# EAGLE board schematic (EAGLE 9.6.2)
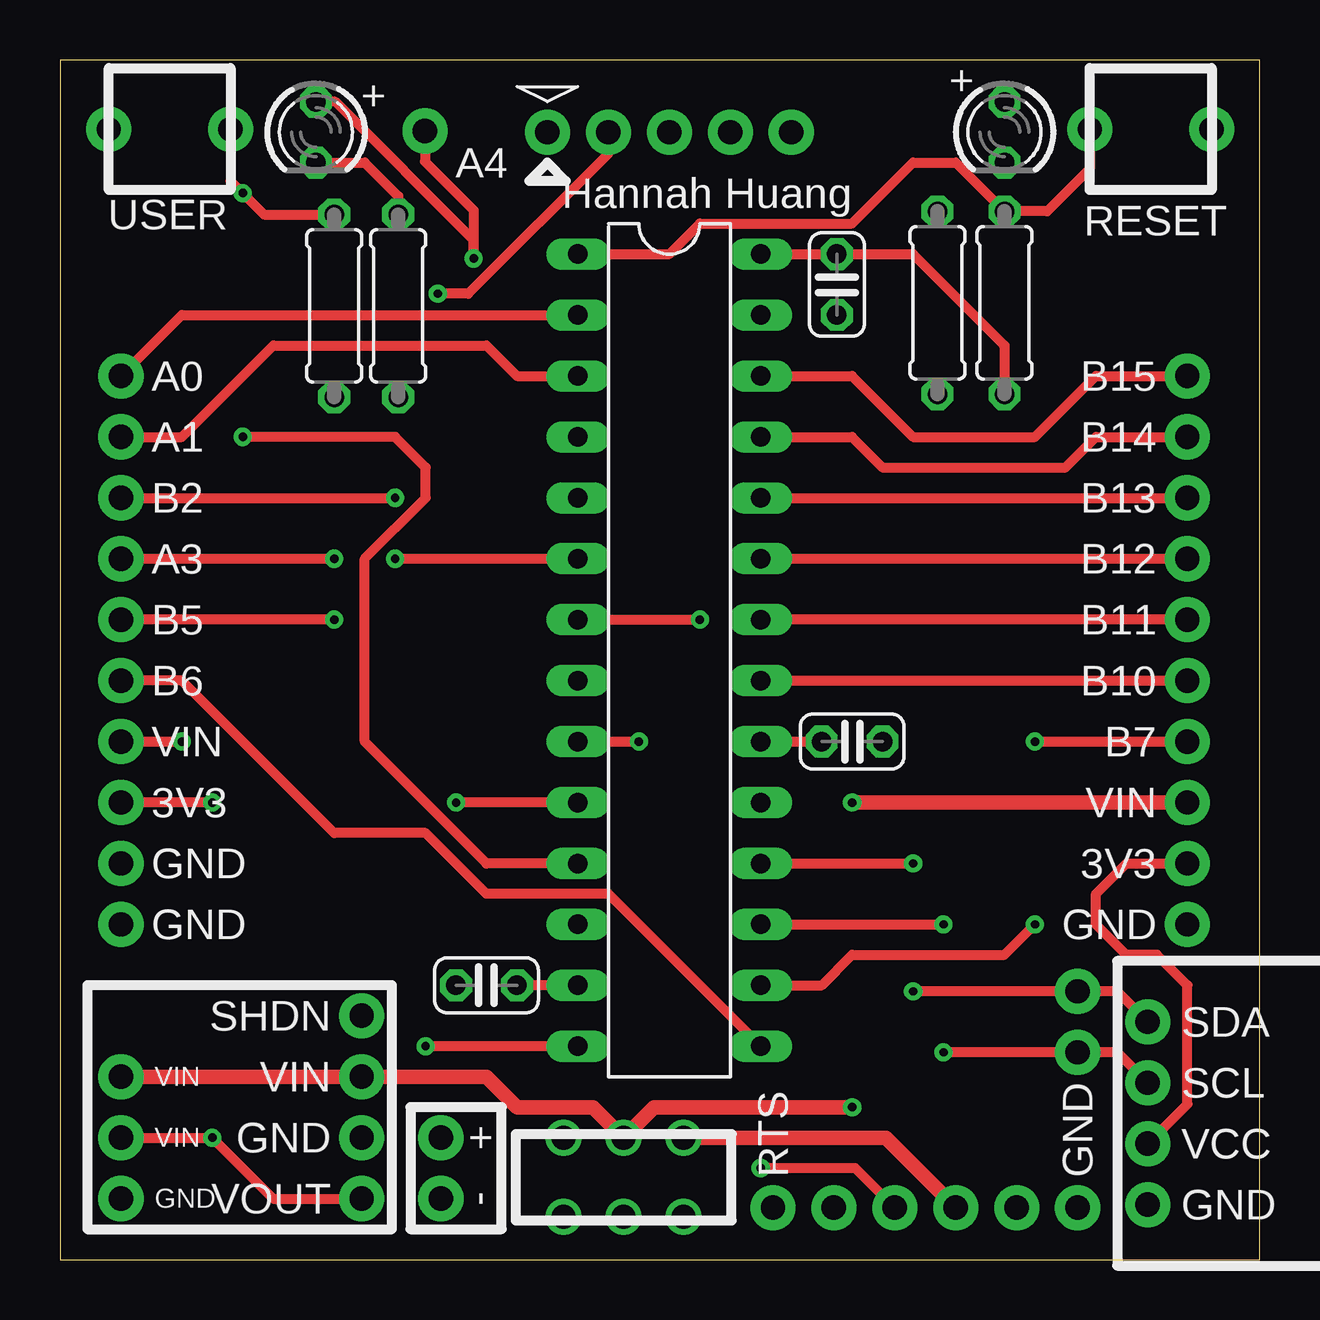
[diagram p0: board, top side]
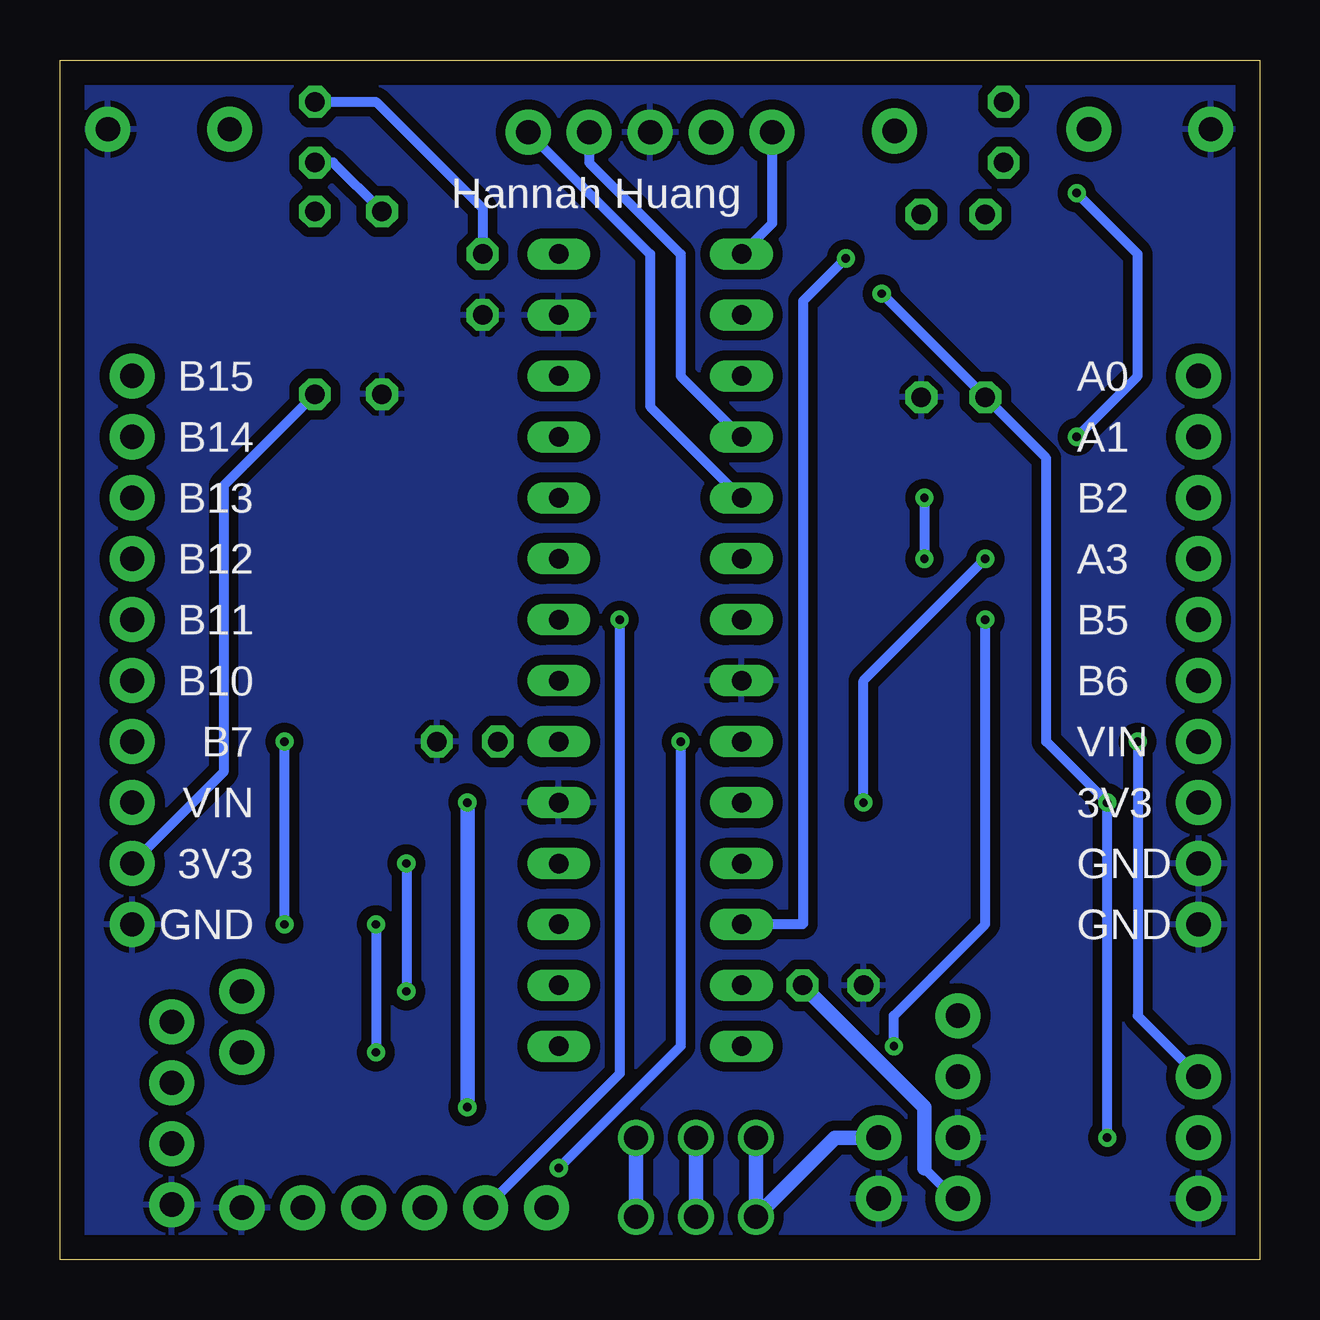
[diagram p1: board, bottom side, seen from below]

Size 50 x 50 mm. Coordinates in mm from the lower left corner, seen from the top.
Outline: 0,0 50,0 50,50 0,50 0,0
Copper layers (1*16): Top 0.035mm / dielectric 1.5mm / Bottom 0.035mm
Design rules "default": minimum track width 6mil, minimum drill 0.35mm, track to track 6mil, track to pad 6mil, pad to pad 6mil, via to via 6mil, smd to smd 6mil, copper to edge 40mil, drill to drill 6mil, minimum pad ring 10mil, minimum via ring 8mil, stop-mask expansion 4mil, vias tented up to drill 0mil, thermal gap 10mil

## Footprints (pad centres in the part's own frame; a part is rotated, then mirrored left to right if it is on the bottom)
C025-024X044 = drill 0.813 octagon: 1 -1.27,0; 2 1.27,0
LED3MM = drill 0.813 octagon: A -1.27,0; K 1.27,0
0207/7 = drill 0.813 octagon: 1 -3.81,0; 2 3.81,0
DIL28-3 = drill 0.813 long: 1 -16.51,-3.81; 2 -13.97,-3.81; 3 -11.43,-3.81; 4 -8.89,-3.81; 5 -6.35,-3.81; 6 -3.81,-3.81; 7 -1.27,-3.81; 8 1.27,-3.81; 9 3.81,-3.81; 10 6.35,-3.81; 11 8.89,-3.81; 12 11.43,-3.81; 13 13.97,-3.81; 14 16.51,-3.81; 15 16.51,3.81; 16 13.97,3.81; 17 11.43,3.81; 18 8.89,3.81; 19 6.35,3.81; 20 3.81,3.81; 21 1.27,3.81; 22 -1.27,3.81; 23 -3.81,3.81; 24 -6.35,3.81; 25 -8.89,3.81; 26 -11.43,3.81; 27 -13.97,3.81; 28 -16.51,3.81
BAT = drill 1.016 pad 1.88: 1 -1.27,0; 2 1.27,0
SLIDE = drill 1: 1 -2.5,-1.65; 2 0,-1.65; 3 2.5,-1.65; 4 2.5,1.65; 5 0,1.65; 6 -2.5,1.65
VREG = drill 1.016 pad 1.88: 1 -3.81,0; 2 -1.27,0; 3 1.27,0; 4 3.81,0
USBTOUART = drill 1.016 pad 1.88: 1 -6.35,0; 2 -3.81,0; 3 -1.27,0; 4 1.27,0; 5 3.81,0; 6 6.35,0
SNAP = drill 1.016 pad 1.88: 1 -5.08,0; 2 -2.54,0; 3 0,0; 4 2.54,0; 5 5.08,0
DISPLAY = drill 1.016 pad 1.88: 1 0,-3.81; 2 0,-1.27; 3 0,1.27; 4 0,3.81
BUTTON = drill 1.016 pad 1.88: 1 -2.54,0; 2 2.54,0
ONE = drill 1.016 pad 1.88: P$1 0,0
FIVE = drill 1.016 pad 1.88: 1 -5.08,0; 2 -2.54,0; 3 0,0; 4 2.54,0; 5 5.08,0

## Placement (x,y rotation side)
C1  0.1uF  [C025-024X044]  32.38,40.64 270 top
C2  0.1uF  [C025-024X044]  17.78,11.43 180 top
C3  10uF  [C025-024X044]  33.02,21.59 0 top
LED1  RED  [LED3MM]  39.37,46.99 270 top
LED2  GREEN  [LED3MM]  10.67,46.99 270 top
R1  330  [0207/7]  36.58,39.88 90 top
R2  330  [0207/7]  14.1,39.75 90 top
R3  10K  [0207/7]  39.37,39.88 270 top
R4  10K  [0207/7]  11.43,39.75 270 top
U$1  PIC32MX170F256B  [DIL28-3]  25.4,25.4 270 top
U$2  BAT  [BAT]  15.88,3.81 90 top
U$3  SLIDESLIDE  [SLIDE]  23.5,3.43 0 top
U$4  VREG  [VREG]  12.57,6.35 90 top
U$5  USBTOUART  [USBTOUART]  36.07,2.16 180 top
U$6  SNAP  [SNAP]  25.4,46.99 0 top
U$7  DISPLAY  [DISPLAY]  45.34,6.1 0 top
U$8  RESET  [BUTTON]  45.47,47.12 0 top
U$9  USER  [BUTTON]  4.57,47.12 180 top
U$10  ONE  [ONE]  42.42,11.18 0 top
U$11  ONE  [ONE]  42.42,8.64 0 top
U$12  FIVE  [FIVE]  46.99,31.75 270 top
U$13  FIVE  [FIVE]  46.99,19.05 270 top
U$14  FIVE  [FIVE]  2.54,19.05 270 top
U$15  FIVE  [FIVE]  2.54,31.75 270 top
U$16  ONE  [ONE]  2.54,7.62 0 top
U$17  ONE  [ONE]  2.54,5.08 0 top
U$18  ONE  [ONE]  2.54,2.54 0 top

## Library data of the parts
C1-C3 = pic32_pcb; SPICEPREFIX: C
LED1 LED2 U$1-U$18 = pic32_pcb
R1-R4 = pic32_pcb; SPICEPREFIX: R

## Nets
+3V3: C2.1 R4.2 U$1.13 U$4.1 U$6.2 U$14.3 U$17.P$1
+5V: U$3.3 U$3.4 U$5.3
A0: U$1.2 U$15.1
A1: U$1.3 U$15.2
A3: U$1.10 U$15.4
A4: LED2.A U$1.12
B2: U$1.6 U$15.3
B4: R4.1 U$1.11 U$9.1
B5: U$1.14 U$15.5
B6: U$1.15 U$14.1
B7: U$1.16 U$13.2
B10: U$1.21 U$13.1
B11: U$1.22 U$12.5
B12: U$1.23 U$12.4
B13: U$1.24 U$12.3
B14: U$1.25 U$12.2
B15: U$1.26 U$12.1
GND: C1.2 C2.2 C3.2 R1.1 R2.1 U$1.8 U$1.19 U$1.27 U$2.1 U$4.2 U$5.1 U$6.3 U$7.1 U$8.2 U$9.2 U$13.5 U$14.4 U$14.5 U$18.P$1
MCLR: R3.1 U$1.1 U$6.1 U$8.1
N$1: U$2.2 U$3.1 U$3.6
N$2: LED1.K R1.2
N$4: C3.1 U$1.20
N$5: LED2.K R2.2
PGC: U$1.5 U$6.5
PGD: U$1.4 U$6.4
S$1: C1.1 LED1.A R3.2 U$1.28 U$7.2 U$13.4
SCL: U$1.17 U$7.3 U$11.P$1
SDA: U$1.18 U$7.4 U$10.P$1
U1RX: U$1.9 U$5.4
U1TX: U$1.7 U$5.5
VIN: U$3.2 U$3.5 U$4.3 U$13.3 U$14.2 U$16.P$1

## Tracks (layer width: path | path; a pad name or v marks a point on that pad's centre or on a via)
+3V3  (via drill 0.35)
  Top 0.406: U$1.13 C2.1 | U$17.P$1 v6.35,5.08 8.89,2.54 U$4.1 | v6.35,19.05 U$14.3 | U$6.2 22.86,46.1 17.02,40.26 v15.75,40.26
  Bottom 0.406: v6.35,5.08 v6.35,19.05 8.89,21.59 8.89,33.4 R4.2 v15.75,40.26 | 13.97,3.81 12.7,2.54 U$4.1
  Bottom 0.61: C2.1 13.97,6.35 13.97,3.81
+5V
  Top 0.61: U$5.3 34.42,5.08 U$3.4
  Bottom 0.61: U$3.4 U$3.3
A0
  Top 0.406: U$15.1 5.08,39.37 U$1.2
A1
  Top 0.406: U$15.2 5.08,34.29 8.89,38.1 17.78,38.1 19.05,36.83 U$1.3
A3  (via drill 0.35)
  Top 0.406: U$15.4 v11.43,29.21 | U$1.10 v16.51,19.05
  Bottom 0.406: v16.51,19.05 16.51,24.13 v11.43,29.21
A4  (via drill 0.35, 1.02 pad 1.88)
  Top 0.406: LED2.A 11.48,48.26 17.25,42.49 v17.25,41.73 17.25,43.74 15.21,45.77 v15.21,47.04
  Bottom 0.406: v17.25,41.73 19.02,39.95 19.02,13.99 19.05,13.97 U$1.12
B2  (via drill 0.35)
  Top 0.406: U$15.3 v13.97,31.75 | v13.97,29.21 U$1.6
  Bottom 0.406: v13.97,31.75 v13.97,29.21
B4  (via drill 0.35)
  Top 0.406: U$9.1 7.11,44.96 v7.62,44.45 8.51,43.56 R4.1 | U$1.11 17.78,16.51 12.7,21.59 12.7,29.21 15.24,31.75 15.24,33.02 13.97,34.29 v7.62,34.29
  Bottom 0.406: v7.62,34.29 5.08,36.83 5.08,41.91 v7.62,44.45
B5  (via drill 0.35)
  Top 0.406: U$1.14 v15.24,8.89 | v11.43,26.67 U$15.5
  Bottom 0.406: v15.24,8.89 15.24,10.16 11.43,13.97 v11.43,26.67
B6
  Top 0.406: U$1.15 22.86,15.24 17.78,15.24 15.24,17.78 11.43,17.78 5.08,24.13 U$14.1
B7  (via drill 0.35)
  Top 0.406: U$1.16 31.75,11.43 33.02,12.7 39.37,12.7 v40.64,13.97 | v40.64,21.59 U$13.2
  Bottom 0.406: v40.64,13.97 v40.64,21.59
B10
  Top 0.406: U$1.21 U$13.1
B11
  Top 0.406: U$12.5 U$1.22
B12
  Top 0.406: U$1.23 U$12.4
B13
  Top 0.406: U$1.24 U$12.3
B14
  Top 0.406: U$1.25 33.02,34.29 34.29,33.02 41.91,33.02 43.18,34.29 U$12.2
B15
  Top 0.406: U$1.26 33.02,36.83 35.56,34.29 40.64,34.29 43.18,36.83 U$12.1
GND
  pour Bottom (isolate 0.406): 0,0 0,50.8 49.53,50.8 50.8,50.8 50.8,0
MCLR
  Top 0.406: U$8.1 42.93,45.47 41.15,43.69 R3.1 37.34,45.72 35.56,45.72 33.02,43.18 26.67,43.18 25.4,41.91 U$1.1
  Bottom 0.406: U$1.1 20.32,43.18 U$6.1
N$1
  Bottom 0.61: U$3.6 U$3.1 17.69,5.08 U$2.2
N$2
  Bottom 0.406: R1.2 38.61,45.72 LED1.K
N$4
  Top 0.406: U$1.20 C3.1
N$5
  Top 0.406: R2.2 14.1,44.32 12.7,45.72 LED2.K
PGC
  Bottom 0.406: U$1.5 25.4,35.56 25.4,41.91 U$6.5
PGD
  Bottom 0.406: U$6.4 27.94,45.72 24.13,41.91 24.13,36.83 U$1.4
S$1
  Top 0.406: U$1.28 C1.1 35.56,41.91 39.37,38.1 R3.2 | U$13.4 44.45,16.51 43.18,15.24 43.18,13.97 44.45,12.7 45.72,12.7 46.99,11.43 46.99,6.48 U$7.2
  Bottom 0.406: LED1.A 36.83,48.26 32.38,43.81 C1.1 | R3.2 43.18,32.26 43.18,20.32 U$13.4
SCL  (via drill 0.35)
  Top 0.406: U$1.17 v36.83,13.97 | v36.83,8.64 U$11.P$1 44.07,8.64 U$7.3
  Bottom 0.406: v36.83,13.97 v36.83,8.64
SDA  (via drill 0.35)
  Top 0.406: U$1.18 v35.56,16.51 | v35.56,11.18 U$10.P$1 44.07,11.18 U$7.4
  Bottom 0.406: v35.56,16.51 v35.56,11.18
U1RX  (via drill 0.35)
  Top 0.406: U$1.9 v24.13,21.59 | U$5.4 33.15,3.81 v29.21,3.81
  Bottom 0.406: v24.13,21.59 24.13,8.89 v29.21,3.81
U1TX  (via drill 0.35)
  Top 0.406: U$1.7 v26.67,26.67
  Bottom 0.406: U$5.5 26.67,7.75 v26.67,26.67
VIN  (via drill 0.35)
  Top 0.406: U$14.2 v5.08,21.59
  Top 0.61: v33.02,6.35 24.77,6.35 U$3.5 22.22,6.35 19.05,6.35 17.78,7.62 U$4.3 U$16.P$1 | v33.02,19.05 U$13.3
  Bottom 0.406: v5.08,21.59 5.08,10.16 U$16.P$1
  Bottom 0.61: U$3.5 U$3.2 | v33.02,19.05 v33.02,6.35

## Text on the board
tPlace: + | + | A4 | Hannah Huang | A0 | B15 | A1 | B14 | B2 | B13 | A3 | B12 | B5 | B11 | B6 | B10 | VIN | B7 | 3V3 | VIN | GND | 3V3 | GND | GND | VIN | VIN | GND
bPlace: Hannah Huang | A0 | B15 | A1 | B14 | B2 | B13 | A3 | B12 | B5 | B11 | B6 | B10 | VIN | B7 | 3V3 | VIN | GND | 3V3 | GND | GND